# EAGLE board Dual 13EM7 Board (EAGLE 5.11)
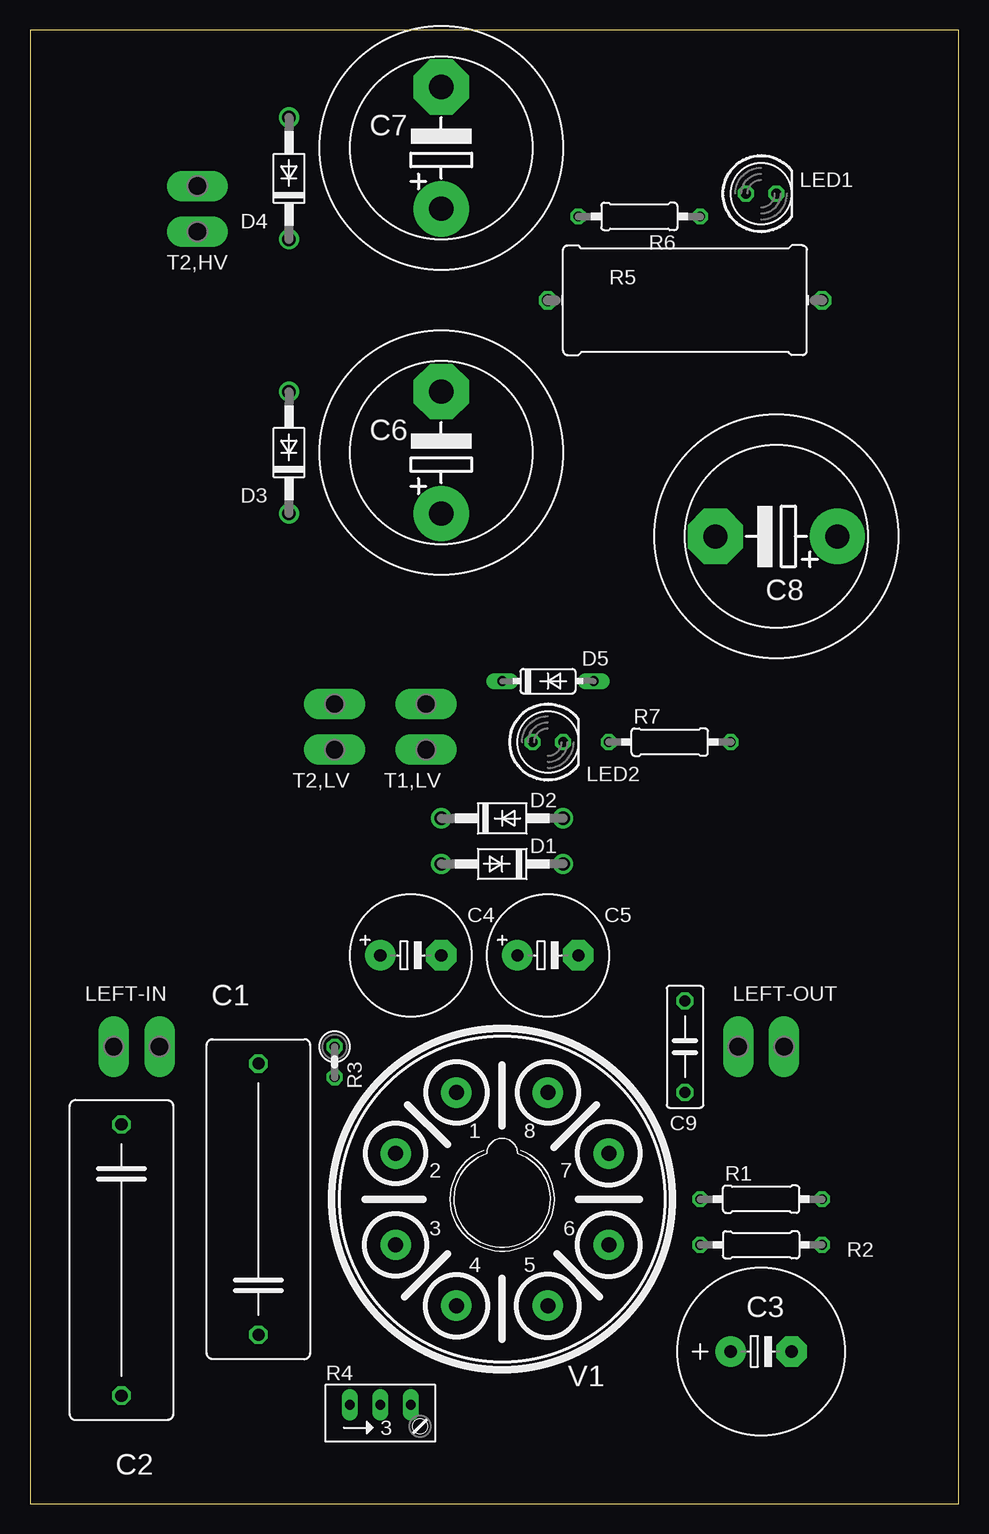
[diagram p0: board, top side]
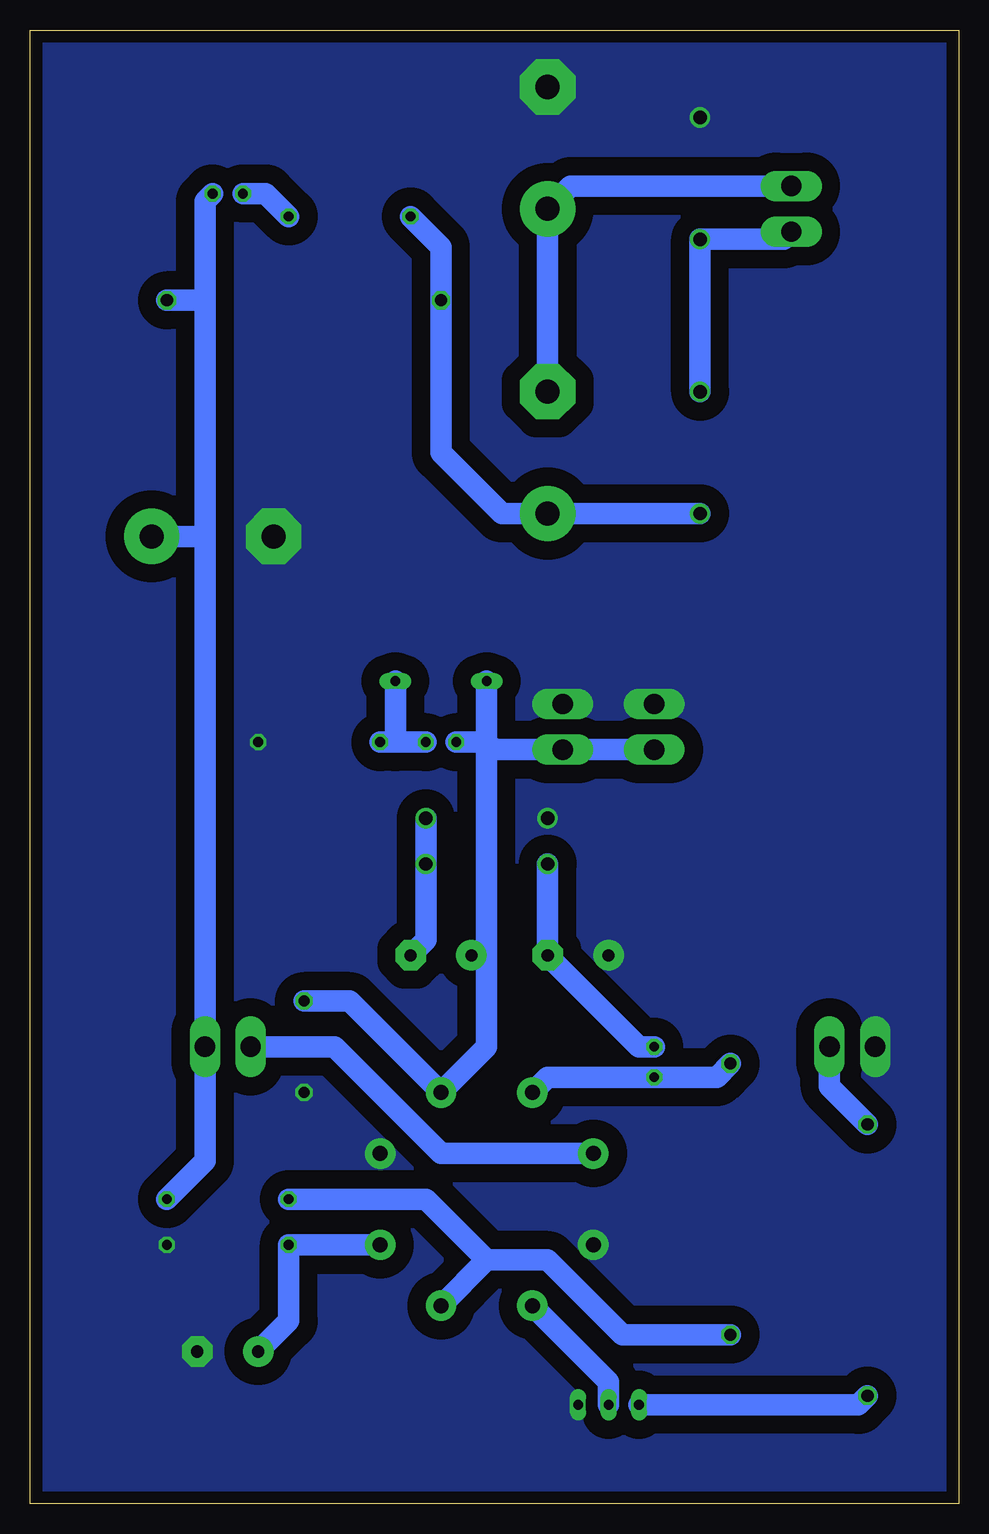
[diagram p1: board, bottom side, seen from below]

Size 77.45 x 122.86 mm. Coordinates in mm from the lower left corner, seen from the top.
Outline: 0,0 77.45,0 77.45,122.86 0,122.86 0,0
Copper layers (1*16): Top 0.035mm / dielectric 1.5mm / Bottom 0.035mm
Design rules "default *": minimum track width 10mil, minimum drill 24mil, track to track 60mil, track to pad 60mil, pad to pad 60mil, via to via 60mil, smd to smd 60mil, copper to edge 40mil, drill to drill 8mil, minimum pad ring 10mil, minimum via ring 8mil, stop-mask expansion 4mil, vias tented up to drill 0mil, thermal gap 10mil

## Footprints (pad centres in the part's own frame; a part is rotated, then mirrored left to right if it is on the bottom)
C225-087X268 = drill 1.016 octagon: 1 -11.303,0; 2 11.303,0
E5-13 = drill 1.016 pad 2.54 round: + -2.54,0 | drill 1.016 pad 2.54 octagon: - 2.54,0
E5-10,5 = drill 1.016 pad 2.54 round: + -2.54,0 | drill 1.016 pad 2.54 octagon: - 2.54,0
EB20D = drill 2.007 pad 4.597 round: + -5.08,0 | drill 2.007 pad 4.597 octagon: - 5.08,0
C075-032X103 = drill 0.914 octagon: 1 -3.81,0; 2 3.81,0
DO41-10 = drill 1.118 round: A 5.08,0; C -5.08,0
DO35-7 = drill 0.813 long: A 3.81,0; C -3.81,0
LED5MM = drill 0.813 octagon: A -1.27,0; K 1.27,0
P2-38-17 = drill 1.702 pad 2.121 long: TP-1 -1.905,0; TP-2 1.905,0
0207/10 = drill 0.813 octagon: 1 -5.08,0; 2 5.08,0
0207/2V = drill 0.813 octagon: 1 -1.27,0; 2 1.27,0
RJ9W = drill 0.813 long: A 2.54,0.635; E -2.54,0.635; S 0,0.635
0922/22 = drill 1.016 octagon: 1 -11.43,0; 2 11.43,0
OKTAL = drill 1.27 pad 2.54 round: 1 3.81,-8.89; 2 8.89,-3.81; 3 8.89,3.81; 4 3.81,8.89; 5 -3.81,8.89; 6 -8.89,3.81; 7 -8.89,-3.81; 8 -3.81,-8.89

## Placement (x,y rotation side)
C1  0.015uF  [C225-087X268]  19.05,25.4 90 top
C2  0.1uF  [C225-087X268]  7.62,20.32 270 top
C3  100uF  [E5-13]  60.96,12.7 0 top
C4  470uF  [E5-10,5]  31.75,45.72 0 top
C5  470uF  [E5-10,5]  43.18,45.72 0 top
C6  470uF  [EB20D]  34.29,87.63 90 top
C7  470uF  [EB20D]  34.29,113.03 90 top
C8  100uF  [EB20D]  62.23,80.64 180 top
C9  0.1uF  [C075-032X103]  54.61,38.1 270 top
D1  1N4002  [DO41-10]  39.37,53.34 180 top
D2  1N4002  [DO41-10]  39.37,57.15 0 top
D3  1N4007  [DO41-10]  21.59,87.63 90 top
D4  1N4007  [DO41-10]  21.59,110.49 90 top
D5  1N4148  [DO35-7]  43.18,68.58 0 top
LED1  BLUE  [LED5MM]  60.96,109.22 0 top
LED2  GREEN  [LED5MM]  43.18,63.5 0 top
LEFT-IN  PTR2  [P2-38-17]  8.89,38.1 180 top
LEFT-OUT  PTR2  [P2-38-17]  60.96,38.1 0 top
R1  47K  [0207/10]  60.96,25.4 0 top
R2  820R  [0207/10]  60.96,21.59 180 top
R3  470K  [0207/2V]  25.4,36.83 270 top
R4  100K  [RJ9W]  29.21,7.62 0 top
R5  100R 1W  [0922/22]  54.61,100.33 0 top
R6  330R  [0207/10]  50.8,107.31 180 top
R7  1K  [0207/10]  53.34,63.5 0 top
T1,LV  PTR2  [P2-38-17]  33.02,64.77 90 top
T2,HV  PTR2  [P2-38-17]  13.97,107.95 90 top
T2,LV  PTR2  [P2-38-17]  25.4,64.77 90 top
V1  13EM7  [OKTAL]  39.37,25.4 180 top

## Library data of the parts
C1-C8 = rcl
C9 R1-R3 R5-R7 = resistor
D1-D5 = diode
LED1 LED2 = led
LEFT-IN LEFT-OUT T1,LV T2,HV T2,LV = testpad
R4 = pot
V1 = tubes

## Nets
GND: C3.- C4.+ C7.- C8.- C9.2 D2.C D4.A LEFT-IN.TP-2 R2.1 R4.A R7.2 T1,LV.TP-2 T2,LV.TP-2 V1.3 V1.7
HEATER: C5.+ C9.1 D5.C LED2.A T1,LV.TP-1 T2,LV.TP-1 V1.8
N$1: C1.1 R1.1 V1.5
N$2: C3.+ R2.2 V1.6
N$3: C1.2 R3.2 V1.1
N$4: LEFT-OUT.TP-1 V1.2
N$5: C2.2 R4.E
N$6: R4.S V1.4
N$7: C2.1 LEFT-IN.TP-1
N$8: C4.- D1.A R3.1
N$9: C5.- D1.C D2.A
N$11: LED1.A R6.1
N$12: D3.A D4.C T2,HV.TP-1
N$13: C6.- C7.+ T2,HV.TP-2
N$14: C6.+ D3.C R5.1 R6.2
N$15: D5.A LED2.K R7.1
V+: C8.+ LED1.K LEFT-OUT.TP-2 R1.2 R5.2

## Tracks (layer width: path | path; a pad name or v marks a point on that pad's centre or on a via)
GND
  pour Bottom (no thermals): 0,123.19 0,0 77.47,0 77.47,123.19
HEATER
  Bottom 1.778: 39.37,63.5 D5.C | 39.37,63.5 LED2.A | T2,LV.TP-1 T1,LV.TP-1 38.73,62.87 39.37,63.5 | 39.37,45.72 39.37,38.1 V1.8 50.8,41.91 C9.1 | 39.37,45.72 39.37,63.5 | 39.37,45.72 C5.+
N$1
  Bottom 1.778: C1.1 28.07,14.1 34.29,20.32 39.37,20.32 | 39.37,20.32 V1.5 | R1.1 44.45,25.4 39.37,20.32
N$2
  Bottom 1.778: V1.6 R2.2 55.88,15.24 C3.+
N$3
  Bottom 1.778: V1.1 34.29,35.56 R3.2 20.19,35.56 C1.2
N$4
  Bottom 1.778: V1.2 43.18,29.21 52.07,38.1 LEFT-OUT.TP-1
N$5
  Bottom 1.778: R4.E 8.38,8.26 C2.2
N$6
  Bottom 1.778: R4.S 29.21,10.16 V1.4
N$7
  Bottom 1.778: LEFT-IN.TP-1 10.79,34.8 C2.1
N$8
  Bottom 1.778: R3.1 26.67,38.1 C4.- D1.A
N$9
  Bottom 1.778: D2.A D1.C 44.45,46.99 C5.-
N$11
  Bottom 1.778: LED1.A 57.78,109.22 R6.1
N$12
  Bottom 1.778: D3.A D4.C 14.61,105.41 T2,HV.TP-1
N$13
  Bottom 1.778: C6.- C7.+ 32.38,109.85 T2,HV.TP-2
N$14
  Bottom 1.778: R6.2 43.18,104.77 R5.1 43.18,87.63 38.1,82.55 C6.+ D3.C
N$15
  Bottom 1.778: LED2.K 46.99,63.5 | 46.99,63.5 R7.1 | 46.99,63.5 D5.A
V+
  Bottom 1.778: R1.2 62.87,28.57 LEFT-OUT.TP-2 62.87,80.64 | 62.87,80.64 C8.+ | 62.87,80.64 62.87,100.33 | 62.87,100.33 62.87,108.58 LED1.K | 62.87,100.33 R5.2